# Allegro board TPA61088_TEST_V10A.brd
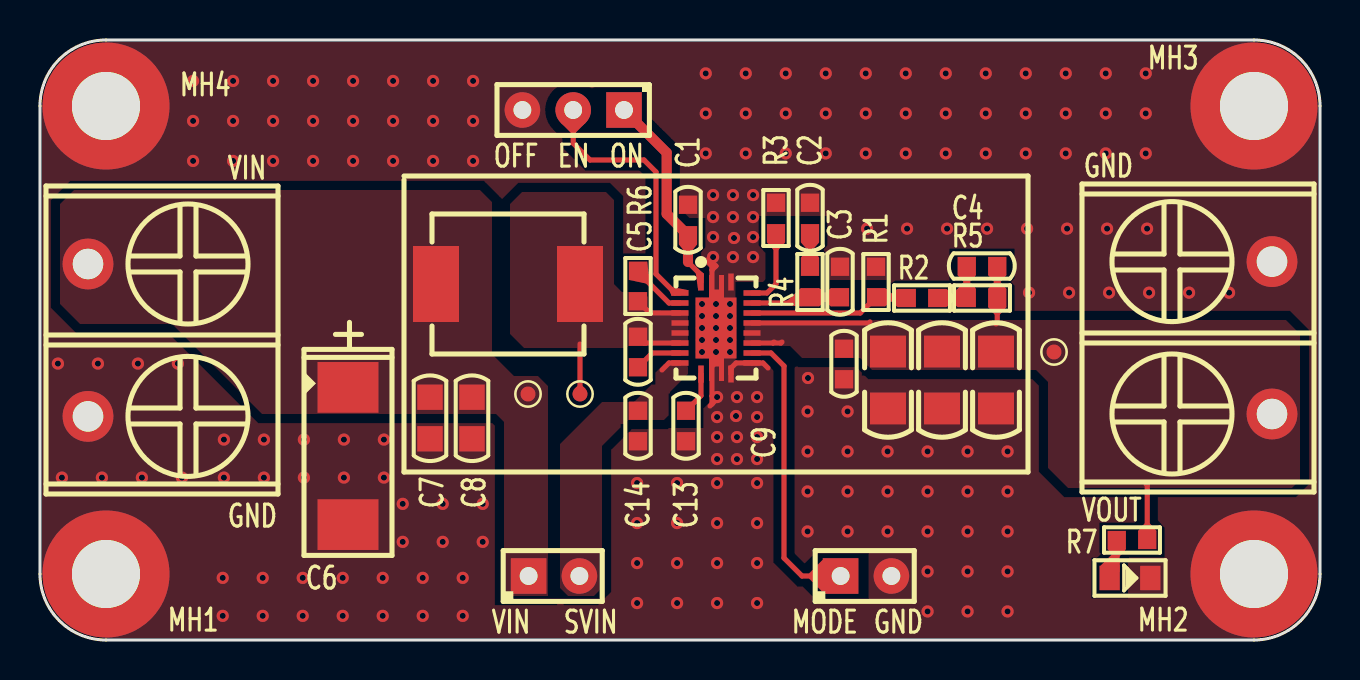
[diagram p0: board, top side]
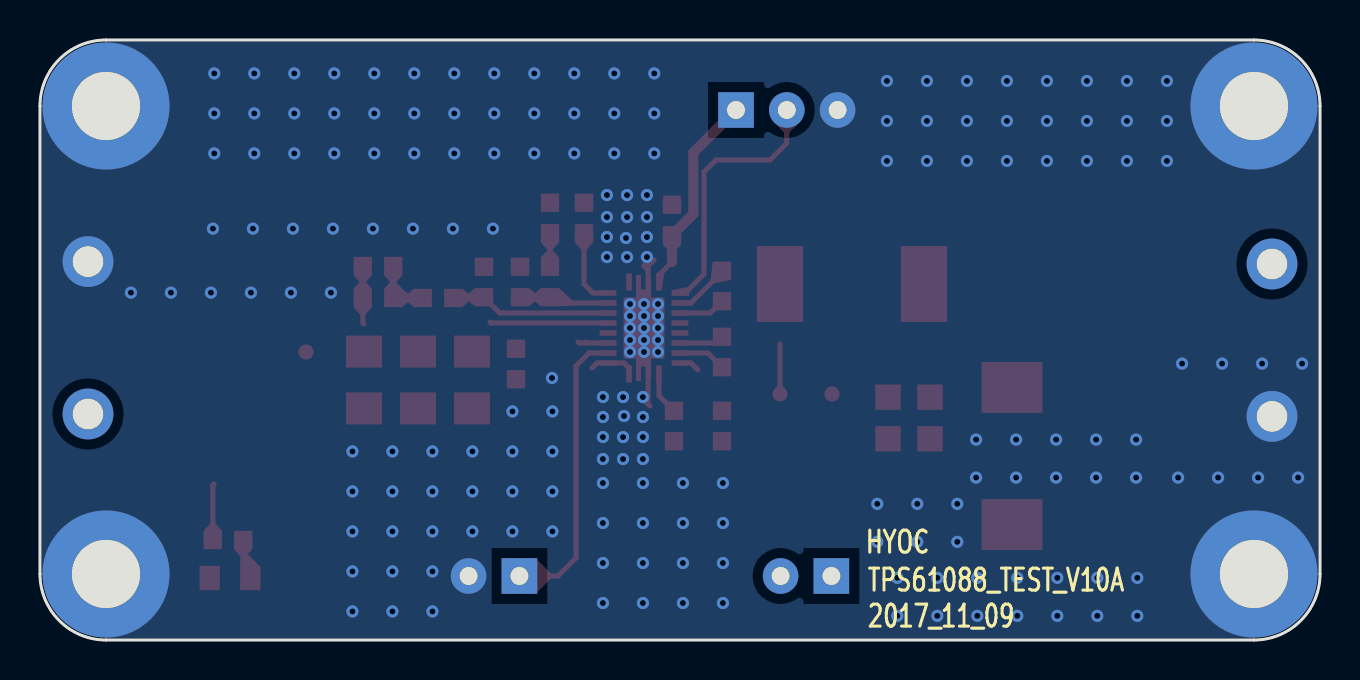
[diagram p1: board, bottom side, seen from below]

Outline 64 x 30 mm; copper layers: TOP, BOTTOM. Coordinates in mm from the lower left corner of the outline.
Outline path: 0,26.7 0,3.3 arc(0.97,0.97) 3.3,0 60.7,0 arc(63.03,0.97) 64,3.3 64,26.7 arc(63.03,29.03) 60.7,30 3.3,30 arc(0.97,29.03) 0,26.7

## Placement (name value [footprint] x y rotation side)
C1  10uF_25V  [CC0603]  32.4 21 90 top
C2  4.7nF_50V  [CC0603]  38.5 21.1 90 top
C3  1nF_50V/NI  [CC0603]  40 17.9 90 top
C4  1nF_50V  [CC0603]  47.1 18.7 180 top
C5  0.1uF_50V  [CC0603]  29.9 14.4 90 top
C6  220uF_10V_7343/NI  [CC7343_31]  15.4 9.2 270 top
C7  10uF_25V  [CC0805]  19.5 11.1 270 top
C8  10uF_25V  [CC0805]  21.6 11.1 270 top
C9  0.1uF_50V  [CC0603]  40.2 13.8 90 top
C10  22uF_25V  [CC1206]  42.4 13 270 top
C11  22uF_25V  [CC1206]  45.1 13 270 top
C12  22uF_25V  [CC1206]  47.8 13 270 top
C13  47nF_50V  [CC0603]  32.3 10.7 90 top
C14  0.1uF_50V  [CC0603]  29.9 10.7 90 top
D1  LED_GREEN  [LED0805]  54.5 3.1 0 top
J1  -  [HEADER3X1_2R54]  29.2 26.5 180 top
J2  -  [KF7R62-2P]  2.4 18.8 270 top
J3  -  [KF7R62-2P]  61.6 11.3 90 top
J4  -  [HEADER2X1_2R54]  25.7 3.2 0 top
J5  -  [HEADER2X1_2R54]  41.3 3.2 0 top
L1  TSM0630-3R3M  [TSM0630]  23.4 17.8 0 top
MH1  HOLD-M3  [HOLD250D134]  3.3 3.3 0 top
MH2  HOLD-M3  [HOLD250D134]  60.7 3.3 0 top
MH3  HOLD-M3  [HOLD250D134]  60.7 26.7 0 top
MH4  HOLD-M3  [HOLD250D134]  3.3 26.7 0 top
NOREF  -  []  0 0 0 top
NOREF#2  -  []  0 0 90 top
NOREF#3  -  []  0 0 0 top
NOREF#4  -  []  0 0 0 top
NOREF#5  -  []  0 0 90 top
NOREF#6  -  []  0 0 90 top
R1  113K  [RC0603]  41.8 17.9 270 top
R2  0R  [RC0603]  44.1 17.1 0 top
R3  100K  [RC0603]  36.8 21.1 270 top
R4  17.4K  [RC0603]  38.5 17.9 270 top
R5  1M  [RC0603]  47.1 17.1 0 top
R6  255K  [RC0603]  29.9 17.7 270 top
R7  10K  [RC0603]  54.6 5 0 top
TP1  TestPoint  [TP-0R75]  50.7 14.4 0 top
TP2  TestPoint  [TP-0R75]  24.4 12.3 0 top
TP3  TestPoint  [TP-0R75]  27 12.3 0 top
U1  TPS61088RHLR  [VQFN-20]  33.8 15.6 270 top

## Library data of the parts
C1-C5 C9 C13 C14 = CAP NP_2
C6 = TMP_154254
C7 C8 C10-C12 = CAP NP_3
D1 = LED_4
J1 = CONN FLEX 3
J2 J3 = CONN RCPT 2
J4 J5 = HDR_1
L1 = IND_BEAD_0805_600OHM_1
MH1-MH4 = Hold_1
R1-R7 = R_Generic
TP1-TP3 = TestPoint
U1 = TPS61088RHLR

## Footprints (pads in the part's own frame, mm; a bottom-side part is the same pattern mirrored in y, then rotated)
CC0603
  rect 0.914x0.914 smd: 1(-0.762,0) 2(0.762,0)
CC0805
  rect 1.27x1.27 smd: 1(-1.041,0) 2(1.041,0)
CC1206
  rect 1.6x1.8 smd: 1(-1.422,0) 2(1.422,0)
CC7343_31
  rect 2.54x3.048 smd: 1(-3.429,0) 2(3.429,0)
HEADER2X1_2R54
  rect 1.778x1.778 hole 0.889: 1(-1.27,0)
  round 1.778 hole 0.889: 2(1.27,0)
HEADER3X1_2R54
  rect 1.778x1.778 hole 0.889: 1(0,0)
  round 1.778 hole 0.889: 2(2.54,0) 3(5.08,0)
HOLD250D134
  round 6.35 hole 3.404: 1(0,0)
KF7R62-2P
  round 2.54 hole 1.524: 1(0,0) 2(7.62,0)
LED0805
  rect 1.016x1.219 smd: 1(-1.016,0) 2(1.016,0)
RC0603
  rect 0.914x0.914 smd: 1(-0.762,0) 2(0.762,0)
TP-0R75
  round 0.75 smd: 1(0,0)
TSM0630
  rect 2.3x3.8 smd: 1(-3.6,0) 2(3.6,0)
VQFN-20
  rect 0.85x0.28 smd: 1(-2.3,-0.75) 10(2.3,-0.75) 11(2.3,0.75) 20(-2.3,0.75)
  rect 0.28x0.85 smd: 2(-1.75,-1.8) 3(-1.25,-1.8) 4(-0.75,-1.8) 5(-0.25,-1.8) 6(0.25,-1.8) 7(0.75,-1.8) 8(1.25,-1.8) 9(1.75,-1.8) 12(1.75,1.8) 13(1.25,1.8) 14(0.75,1.8) 15(0.25,1.8) 16(-0.25,1.8) 17(-0.75,1.8) 18(-1.25,1.8) 19(-1.75,1.8)
  custom 5.3x2.05 smd: 21(0,0)

## Nets
GND: C1.2 C2.2 C3.2 C6.2 C7.2 C8.2 C9.1 C10.2 C11.2 C12.2 C13.1 C14.1 D1.2(CATHODE) J1.3 J2.2 J3.2 J5.2 MH1.1 MH2.1 MH3.1 MH4.1 R1.1 R3.1 U1.11(NC_1) U1.12(NC_2) U1.20(AGND) U1.21(PGND)
SVIN: C14.2 J4.2 U1.9(VIN)
VCC: C1.1 J1.1 U1.1(VCC)
VIN: C6.1 C7.1 C8.1 J2.1 J4.1 L1.1(A) TP2.1
MODE: J5.1 U1.13(MODE)
VOUT: C4.1 C9.2 C10.1 C11.1 C12.1 J3.1 R5.2 R7.2 TP1.1 U1.14(VOUT_1) U1.15(VOUT_2) U1.16(VOUT_3)
N16934906: D1.1(ANODE) R7.1
N16970667: C5.2 L1.2(B) R6.2 TP3.1 U1.4(SW_1) U1.5(SW_2) U1.6(SW_3) U1.7(SW_4)
N16970801: R6.1 U1.3(FSW)
N16970833: C5.1 U1.8(BOOT)
N16971448: J1.2 U1.2(EN)
N16971549: C13.2 U1.10(SS)
N16972708: R1.2 R2.1 U1.17(FB)
N16972711: C4.2 R2.2 R5.1
N16972882: R3.2 U1.19(ILIM)
N16972935: C3.1 R4.2 U1.18(COMP)
N16972964: C2.1 R4.1

## Via types
v1: diameter 0.61, hole 0.305, TOP to BOTTOM, 194 vias

## Routing (per net, layer and track width the routed paths; a pad name or vN(x,y) marks a point on that pad's centre or on a via; arc(x,y) is an arc through that point)
GND: length 11.1
  TOP w0.254: U1.11 34.55,13.6 34.8,13.85 U1.12 36.15,13.85 36.4,13.6 ; 33.6,12.2 33.8,12 33.6,11.8 ; 33.6,12.2 33.6,11.8 ; 33.6,12.2 33.6,13.7 33.8,13.9 v1(33.8,14.4) v1(33.8,15) v1(33.8,15.6) 33.6,15.8 33.6,18.5 ; 33.6,18.9 33.8,18.7 33.6,18.5 ; 33.6,11.8 33.5,11.7 ; 33.3,19 33.6,18.7 33.6,18.5
  vias: v1(0.9,13.82) v1(1.1,8.12) v1(2.9,13.82) v1(3.1,8.12) v1(4.9,13.82) v1(5.1,8.12) v1(6.9,13.82) v1(7.1,8.12) v1(7.65,27.95) v1(7.65,25.95) v1(7.65,23.95) v1(9.14,3.11) v1(9.14,1.21) v1(9.2,10.02) v1(9.2,8.12) v1(9.65,27.95) v1(9.65,25.95) v1(9.65,23.95) v1(11.14,3.11) v1(11.14,1.21) v1(11.2,10.02) v1(11.2,8.12) v1(11.65,27.95) v1(11.65,25.95) v1(11.65,23.95) v1(13.14,3.11) v1(13.14,1.21) v1(13.2,10.02) v1(13.2,8.12) v1(13.65,27.95) v1(13.65,25.95) v1(13.65,23.95) v1(15.14,3.11) v1(15.14,1.21) v1(15.2,10.02) v1(15.2,8.12) v1(15.65,27.95) v1(15.65,25.95) v1(15.65,23.95) v1(17.14,3.11) v1(17.14,1.21) v1(17.2,10.02) v1(17.2,8.12) v1(17.65,27.95) v1(17.65,25.95) v1(17.65,23.95) v1(18.14,6.81) v1(18.14,4.91) v1(19.14,3.11) v1(19.14,1.21) v1(19.65,27.95) v1(19.65,25.95) v1(19.65,23.95) v1(20.14,6.81) v1(20.14,4.91) v1(21.14,3.11) v1(21.14,1.21) v1(21.65,27.95) v1(21.65,25.95) v1(21.65,23.95) v1(22.14,6.81) v1(22.14,4.91) v1(29.85,7.85) v1(29.85,5.85) v1(29.85,3.85) v1(29.85,1.85) v1(31.85,7.85) v1(31.85,5.85) v1(31.85,3.85) v1(31.85,1.85) v1(33.1,16.8) v1(33.1,16.2) v1(33.1,15.6) v1(33.1,15) v1(33.1,14.4) v1(33.29,28.33) v1(33.29,26.33) v1(33.29,24.33) v1(33.65,22.25) v1(33.65,21.15) v1(33.65,20.15) v1(33.65,19.15) v1(33.8,16.8) v1(33.8,16.2) v1(33.85,12.15) v1(33.85,11.15) v1(33.85,10.15) v1(33.85,9.05) v1(33.85,7.85) v1(33.85,5.85) v1(33.85,3.85) v1(33.85,1.85) v1(34.5,16.8) v1(34.5,16.2) v1(34.5,15.6) v1(34.5,15) v1(34.5,14.4) v1(34.65,22.25) v1(34.65,21.15) v1(34.65,19.15) v1(34.7,20.1) v1(34.85,12.15) v1(34.8,11.2) v1(34.85,10.15) v1(34.85,9.05) v1(35.29,28.33) v1(35.29,26.33) v1(35.29,24.33) v1(35.65,22.25) v1(35.65,21.15) v1(35.65,20.15) v1(35.65,19.15) v1(35.85,12.15) v1(35.85,11.15) v1(35.85,10.15) v1(35.85,9.05) v1(35.85,7.85) v1(35.85,5.85) v1(35.85,3.85) v1(35.85,1.85) v1(37.29,28.33) v1(37.29,26.33) v1(37.29,24.33) v1(38.4,13.1) v1(38.38,11.43) v1(38.38,9.43) v1(38.38,7.43) v1(38.38,5.43) v1(39.29,28.33) v1(39.29,26.33) v1(39.29,24.33) v1(40.38,11.43) v1(40.38,9.43) v1(40.38,7.43) v1(40.38,5.43) v1(41.29,28.33) v1(41.29,26.33) v1(41.29,24.33) v1(41.35,20.57) v1(42.38,9.43) v1(42.38,7.43) v1(42.38,5.43) v1(43.29,28.33) v1(43.29,26.33) v1(43.29,24.33) v1(43.35,20.57) v1(44.38,9.43) v1(44.38,7.43) v1(44.38,5.43) v1(44.38,3.43) v1(44.38,1.43) v1(45.29,28.33) v1(45.29,26.33) v1(45.29,24.33) v1(45.35,20.57) v1(46.38,9.43) v1(46.38,7.43) v1(46.38,5.43) v1(46.38,3.43) v1(46.38,1.43) v1(47.29,28.33) v1(47.29,26.33) v1(47.29,24.33) v1(47.35,20.57) v1(48.38,9.43) v1(48.38,7.43) v1(48.38,5.43) v1(48.38,3.43) v1(48.38,1.43) v1(49.29,28.33) v1(49.29,26.33) v1(49.29,24.33) v1(49.35,20.57) v1(49.45,17.37) v1(51.29,28.33) v1(51.29,26.33) v1(51.29,24.33) v1(51.35,20.57) v1(51.45,17.37) v1(53.29,28.33) v1(53.29,26.33) v1(53.29,24.33) v1(53.35,20.57) v1(53.45,17.37) v1(55.29,28.33) v1(55.29,26.33) v1(55.29,24.33) v1(55.35,20.57) v1(55.45,17.37) v1(57.45,17.37) v1(59.45,17.37)
SVIN: length 1
  TOP w0.254: 31.1,13.5 31.45,13.85 U1.9
VCC: length 10.2
  TOP w0.254: U1.1 33.05,18.25 32.4,18.9
  TOP w0.508: J1.1 31.33,24.37 31.33,21.3 C1.1 32.4,18.9
VIN: length 0.2
  TOP w0.508: C8.1 21.76,12.3
MODE: length 14.7
  TOP w0.254: U1.13 36.55,14.35 37.2,13.7 37.2,4.1 38.1,3.2 J5.1
VOUT: length 13.3
  TOP w0.254: 41.5,15.9 41.45,15.85 U1.16 ; 37.1,14.9 37.05,14.85 36.65,14.85 ; R7.2 55.36,7.74 55.3,7.8 ; 36.65,14.85 U1.14 ; 36.65,14.85 36.7,14.9 ; 47.8,15.8 47.86,15.86 R5.2 C4.1
N16934906: length 2
  TOP w0.254: R7.1 53.84,3.45 D1.1
N16970667: length 7.1
  TOP w0.254: C5.2 30.21,14.85 U1.7 ; R6.2 30.49,16.35 U1.4 ; TP3.1 27,14.8
N16970801: length 2.8
  TOP w0.254: R6.1 29.9,18.4 31.45,16.85 U1.3
N16970833: length 2.4
  TOP w0.254: C5.1 30.61,14.35 U1.8
N16971448: length 13.1
  TOP w0.254: J1.2 26.66,24.84 27.5,24 30.2,24 30.8,23.4 30.8,18.3 31.75,17.35 U1.2
N16971549: length 2.1
  TOP w0.254: C13.2 33.05,12.21 U1.10
N16972708: length 8.1
  TOP w0.254: U1.17 41.01,16.35 R1.2 43.3,17.14 R2.1
N16972711: length 3.1
  TOP w0.254: R2.2 R5.1 C4.2
N16972882: length 3.9
  TOP w0.254: R3.2 36.8,17.8 36.35,17.35 U1.19
N16972935: length 4.6
  TOP w0.254: C3.1 R4.2 38.5,17.04 38.31,16.85 U1.18
N16972964: length 1.7
  TOP w0.254: R4.1 C2.1

## Copper pours and planes (outline as drawn; the poured copper is in the pictures)
GND on TOP: 3.3,29.9 60.7,29.9 63.9,26.7 63.9,3.3 60.7,0.1 3.3,0.1 0.1,3.3 0.1,26.7 ; 5 cut-outs
GND on BOTTOM: 3.3,29.9 60.7,29.9 63.9,26.7 63.9,3.3 60.7,0.1 3.3,0.1 0.1,3.3 0.1,26.7
SVIN on TOP: 26.4,2.2 26,2.6 26,9.8 28.1,11.9 29.7,11.9 30.7,12.9 30.7,13.3 31.4,14 32.4,14 32.4,13.3 31.5,12.4 31.5,11.3 31.2,11 29.4,11 28.1,9.7 28.1,2.6 27.7,2.2
VIN on TOP: 23.2,2.2 23.2,10.9 22.8,11.3 11.1,11.3 6.6,15.8 2,15.8 1,16.8 1,21.8 1.7,22.5 22,22.5 22.6,21.9 22.6,14.3 23.7,13.2 24.9,13.2 25.4,12.7 25.4,2.2
MODE on TOP (solid shape): 40.06,3.2 39.14,2.39 38.41,3.12 38.38,3.2 38.41,3.28 39.14,4.01
VOUT on TOP: 35.2,16 62.3,16 63,15.3 63,8 62.6,7.6 51.4,7.6 50.4,8.6 50.4,12.9 49.8,13.5 41.6,13.5 41,14.1 38.1,14.1 37.5,14.7 35.2,14.7
N16970667 on TOP: 28.3,22.4 24.1,22.4 23.5,21.8 23.5,15.3 24.2,14.6 29.3,14.6 29.4,14.7 32.4,14.7 32.4,16.5 30.4,16.5 30.4,17.4 29.1,17.4 28.7,17.8 28.7,22
N16934906 on TOP (solid shape): 53.76,4.44 53.88,4.46 53.96,4.37 53.99,3.71 53.48,3.07 53.02,3.71
N16970801 on TOP (solid shape): 30.48,17.94 30.44,17.85 30.35,17.82 29.44,18 29.88,18.49 30.36,18.92
N16971448 on TOP (solid shape): 27.29,25.87 26.75,25.33 26.66,25.3 26.57,25.33 26.03,25.87 26.66,26.53
N16972935 on TOP (solid shape): 38.53,17.15 38.04,16.68 37.39,16.73 37.3,16.81 37.33,16.93 38.04,17.6

Small or netless copper shapes (teardrops, artwork), in the pictures only: 20 on TOP

## Text on the board
Ref Des/Silkscreen Bottom: TPS61088_TEST_V10A | 2017_11_09 | HYOC
Ref Des/Silkscreen Top: VIN | GND | OFF | EN | SVIN | ON | MODE | VOUT
DIMENSION: FIGURE | SIZE | 0.3048 | 0.889 | 1.524 | 3.4036 | DRILL CHART: TOP to BOTTOM | ALL UNITS ARE IN MILLIMETERS | PLATED | QTY | 194 | 7 | 4
